# EAGLE board untitled5 (EAGLE 6.0)
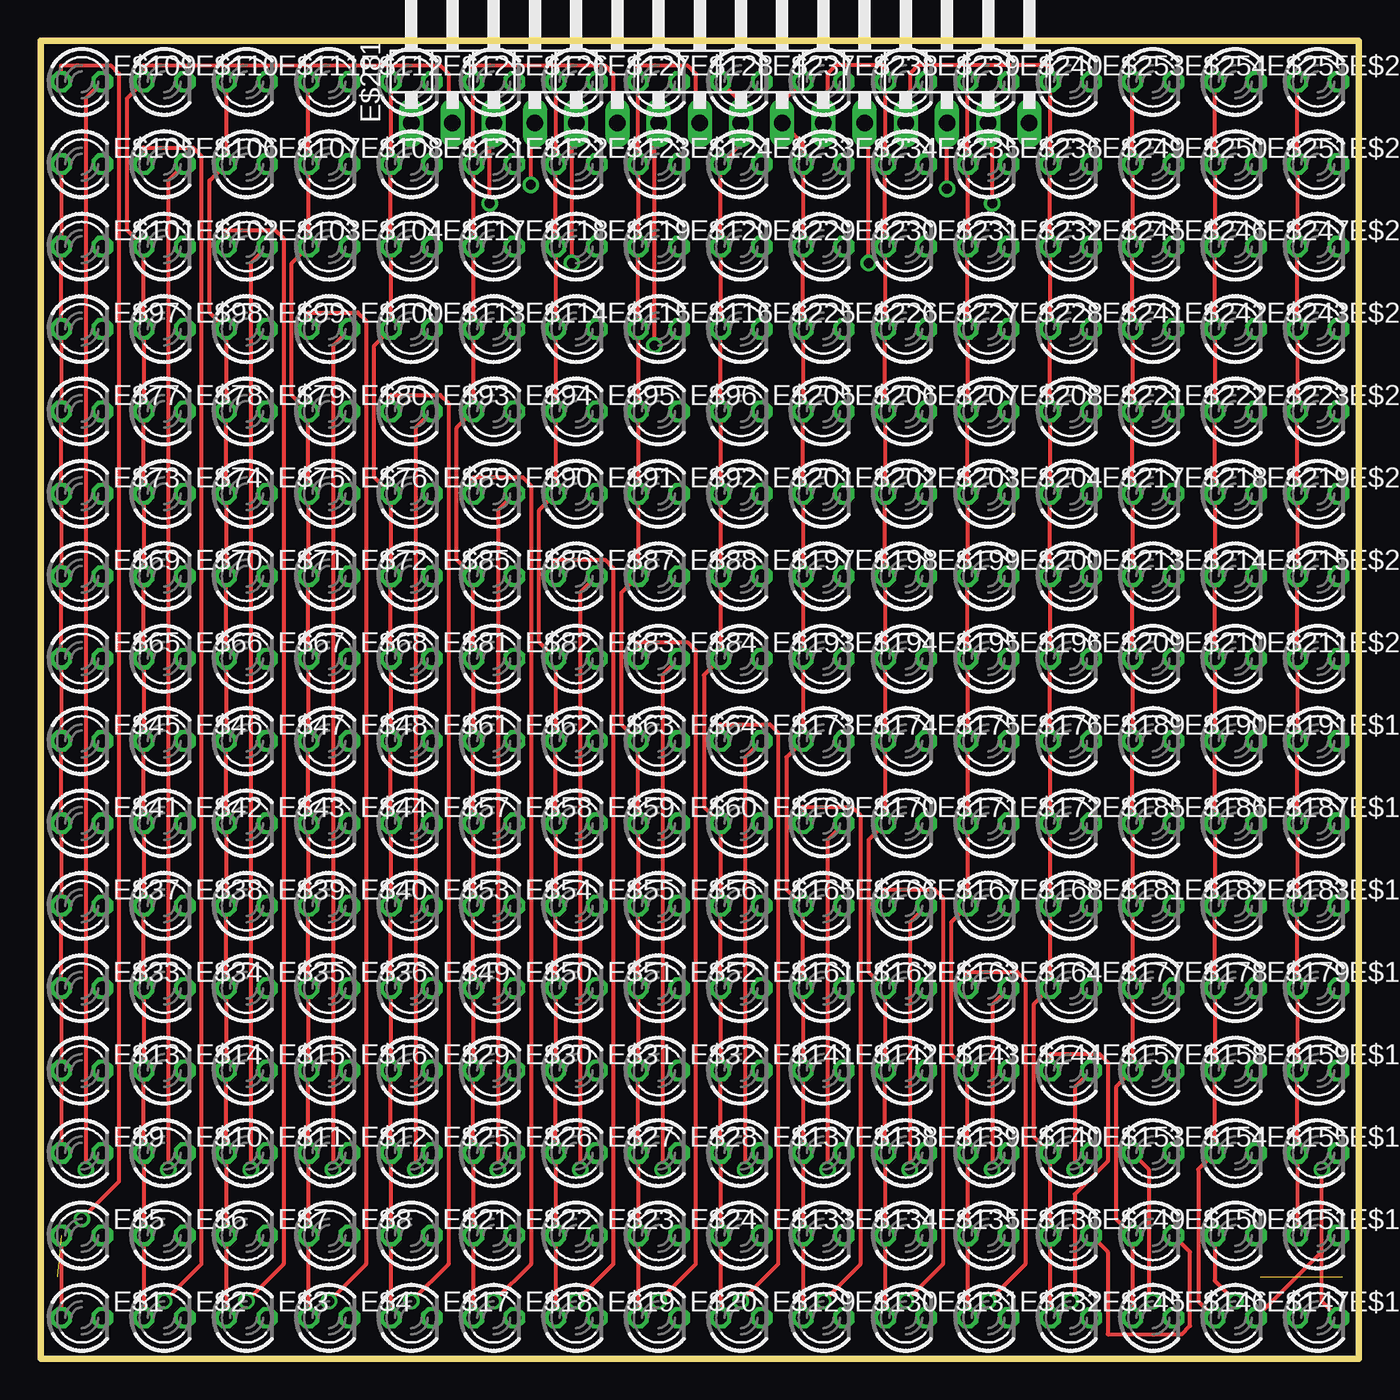
[diagram p0: board, top side]
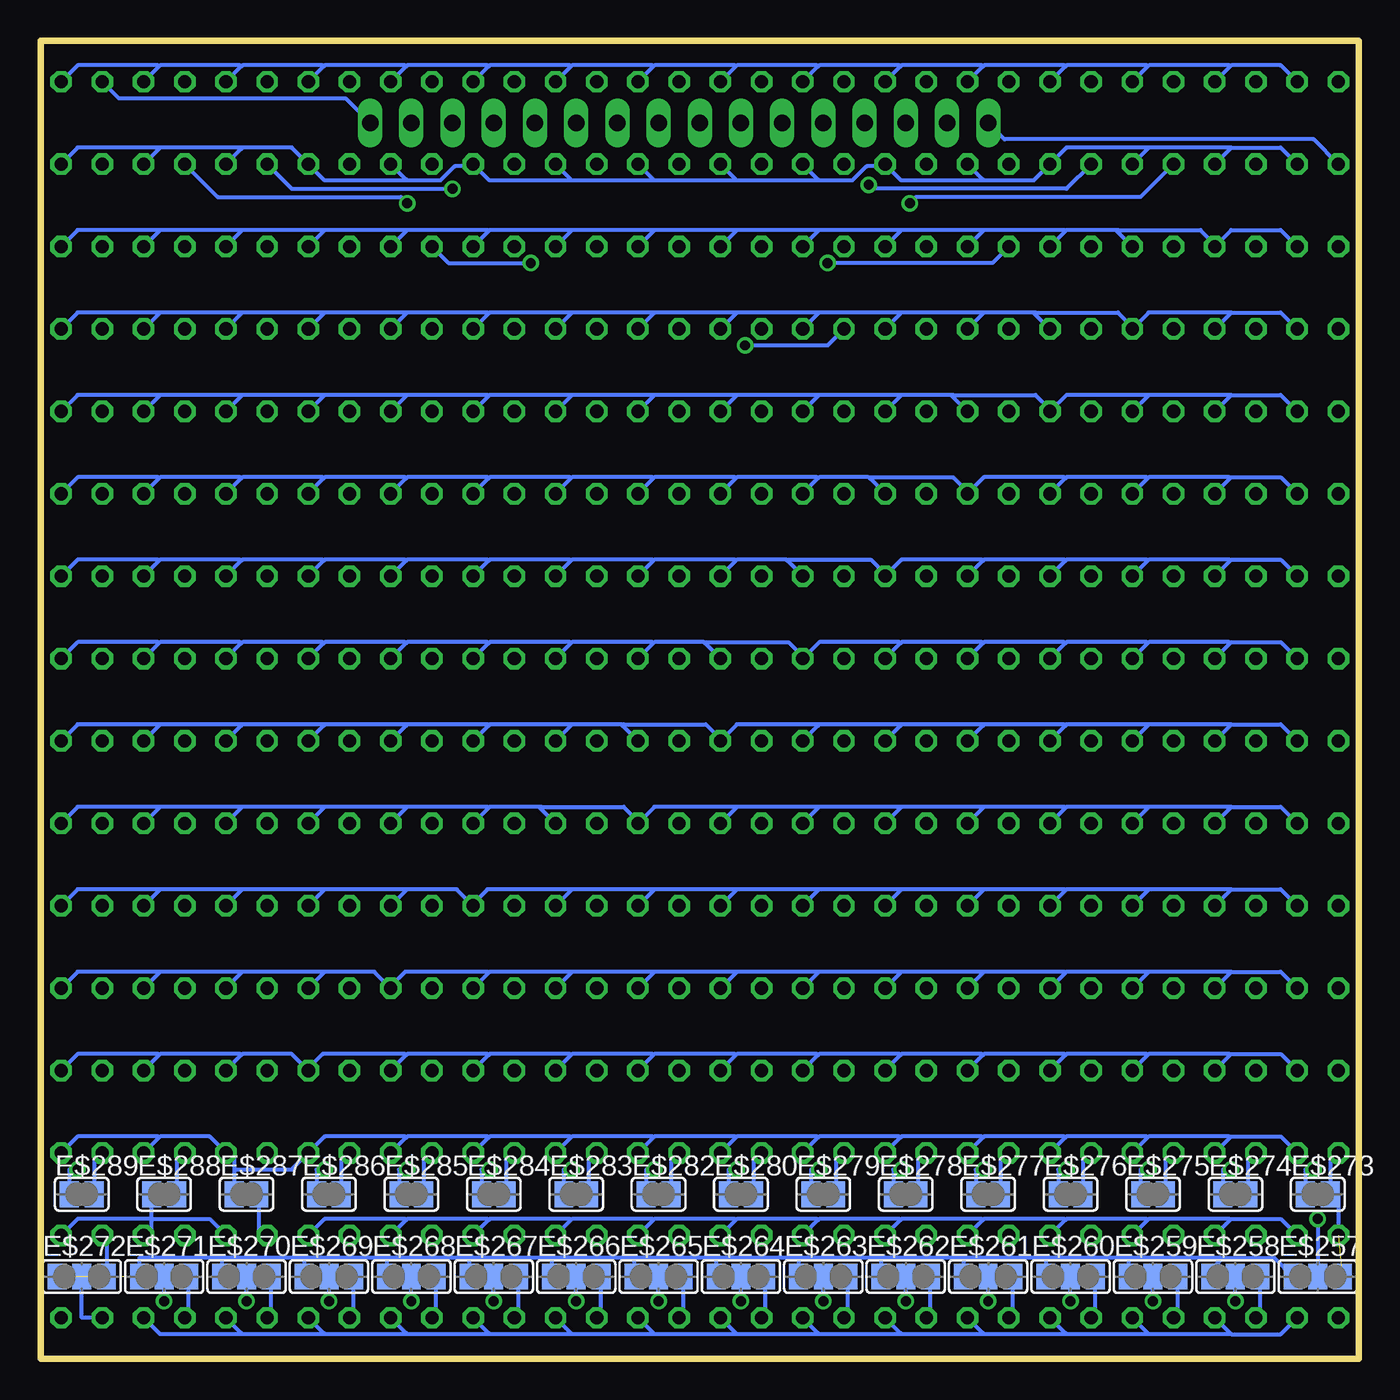
[diagram p1: board, bottom side, seen from below]

Size 81.28 x 81.28 mm. Coordinates in mm from the lower left corner, seen from the top.
Outline: 0,0 81.28,0 81.28,81.28 0,81.28 0,0
Copper layers (1*16): Top 0.035mm / dielectric 1.5mm / Bottom 0.035mm
Design rules: minimum track width 10mil, minimum drill 24mil, track to track 8mil, track to pad 8mil, pad to pad 8mil, via to via 8mil, smd to smd 8mil, copper to edge 30mil, drill to drill 8mil, minimum pad ring 10mil, minimum via ring 8mil, stop-mask expansion 4mil, vias tented up to drill 0mil, thermal gap 10mil

## Footprints (pad centres in the part's own frame; a part is rotated, then mirrored left to right if it is on the bottom)
LED3MM = drill 0.813 octagon: A -1.27,0; K 1.27,0
SJ_2 = smd 1.168 x 1.6: 1 -1.524,0; 2 0,0; 3 1.524,0
SJ = smd 1.168 x 1.6: 1 -0.762,0; 2 0.762,0
1X16/90 = drill 1.016 long: 1 -19.05,-3.81; 2 -16.51,-3.81; 3 -13.97,-3.81; 4 -11.43,-3.81; 5 -8.89,-3.81; 6 -6.35,-3.81; 7 -3.81,-3.81; 8 -1.27,-3.81; 9 1.27,-3.81; 10 3.81,-3.81; 11 6.35,-3.81; 12 8.89,-3.81; 13 11.43,-3.81; 14 13.97,-3.81; 15 16.51,-3.81; 16 19.05,-3.81

## Placement (x,y rotation side)
E$1  [LED3MM]  2.54,2.54 0 top
E$2  [LED3MM]  7.62,2.54 0 top
E$3  [LED3MM]  12.7,2.54 0 top
E$4  [LED3MM]  17.78,2.54 0 top
E$5  [LED3MM]  2.54,7.62 0 top
E$6  [LED3MM]  7.62,7.62 0 top
E$7  [LED3MM]  12.7,7.62 0 top
E$8  [LED3MM]  17.78,7.62 0 top
E$9  [LED3MM]  2.54,12.7 0 top
E$10  [LED3MM]  7.62,12.7 0 top
E$11  [LED3MM]  12.7,12.7 0 top
E$12  [LED3MM]  17.78,12.7 0 top
E$13  [LED3MM]  2.54,17.78 0 top
E$14  [LED3MM]  7.62,17.78 0 top
E$15  [LED3MM]  12.7,17.78 0 top
E$16  [LED3MM]  17.78,17.78 0 top
E$17  [LED3MM]  22.86,2.54 0 top
E$18  [LED3MM]  27.94,2.54 0 top
E$19  [LED3MM]  33.02,2.54 0 top
E$20  [LED3MM]  38.1,2.54 0 top
E$21  [LED3MM]  22.86,7.62 0 top
E$22  [LED3MM]  27.94,7.62 0 top
E$23  [LED3MM]  33.02,7.62 0 top
E$24  [LED3MM]  38.1,7.62 0 top
E$25  [LED3MM]  22.86,12.7 0 top
E$26  [LED3MM]  27.94,12.7 0 top
E$27  [LED3MM]  33.02,12.7 0 top
E$28  [LED3MM]  38.1,12.7 0 top
E$29  [LED3MM]  22.86,17.78 0 top
E$30  [LED3MM]  27.94,17.78 0 top
E$31  [LED3MM]  33.02,17.78 0 top
E$32  [LED3MM]  38.1,17.78 0 top
E$33  [LED3MM]  2.54,22.86 0 top
E$34  [LED3MM]  7.62,22.86 0 top
E$35  [LED3MM]  12.7,22.86 0 top
E$36  [LED3MM]  17.78,22.86 0 top
E$37  [LED3MM]  2.54,27.94 0 top
E$38  [LED3MM]  7.62,27.94 0 top
E$39  [LED3MM]  12.7,27.94 0 top
E$40  [LED3MM]  17.78,27.94 0 top
E$41  [LED3MM]  2.54,33.02 0 top
E$42  [LED3MM]  7.62,33.02 0 top
E$43  [LED3MM]  12.7,33.02 0 top
E$44  [LED3MM]  17.78,33.02 0 top
E$45  [LED3MM]  2.54,38.1 0 top
E$46  [LED3MM]  7.62,38.1 0 top
E$47  [LED3MM]  12.7,38.1 0 top
E$48  [LED3MM]  17.78,38.1 0 top
E$49  [LED3MM]  22.86,22.86 0 top
E$50  [LED3MM]  27.94,22.86 0 top
E$51  [LED3MM]  33.02,22.86 0 top
E$52  [LED3MM]  38.1,22.86 0 top
E$53  [LED3MM]  22.86,27.94 0 top
E$54  [LED3MM]  27.94,27.94 0 top
E$55  [LED3MM]  33.02,27.94 0 top
E$56  [LED3MM]  38.1,27.94 0 top
E$57  [LED3MM]  22.86,33.02 0 top
E$58  [LED3MM]  27.94,33.02 0 top
E$59  [LED3MM]  33.02,33.02 0 top
E$60  [LED3MM]  38.1,33.02 0 top
E$61  [LED3MM]  22.86,38.1 0 top
E$62  [LED3MM]  27.94,38.1 0 top
E$63  [LED3MM]  33.02,38.1 0 top
E$64  [LED3MM]  38.1,38.1 0 top
E$65  [LED3MM]  2.54,43.18 0 top
E$66  [LED3MM]  7.62,43.18 0 top
E$67  [LED3MM]  12.7,43.18 0 top
E$68  [LED3MM]  17.78,43.18 0 top
E$69  [LED3MM]  2.54,48.26 0 top
E$70  [LED3MM]  7.62,48.26 0 top
E$71  [LED3MM]  12.7,48.26 0 top
E$72  [LED3MM]  17.78,48.26 0 top
E$73  [LED3MM]  2.54,53.34 0 top
E$74  [LED3MM]  7.62,53.34 0 top
E$75  [LED3MM]  12.7,53.34 0 top
E$76  [LED3MM]  17.78,53.34 0 top
E$77  [LED3MM]  2.54,58.42 0 top
E$78  [LED3MM]  7.62,58.42 0 top
E$79  [LED3MM]  12.7,58.42 0 top
E$80  [LED3MM]  17.78,58.42 0 top
E$81  [LED3MM]  22.86,43.18 0 top
E$82  [LED3MM]  27.94,43.18 0 top
E$83  [LED3MM]  33.02,43.18 0 top
E$84  [LED3MM]  38.1,43.18 0 top
E$85  [LED3MM]  22.86,48.26 0 top
E$86  [LED3MM]  27.94,48.26 0 top
E$87  [LED3MM]  33.02,48.26 0 top
E$88  [LED3MM]  38.1,48.26 0 top
E$89  [LED3MM]  22.86,53.34 0 top
E$90  [LED3MM]  27.94,53.34 0 top
E$91  [LED3MM]  33.02,53.34 0 top
E$92  [LED3MM]  38.1,53.34 0 top
E$93  [LED3MM]  22.86,58.42 0 top
E$94  [LED3MM]  27.94,58.42 0 top
E$95  [LED3MM]  33.02,58.42 0 top
E$96  [LED3MM]  38.1,58.42 0 top
E$97  [LED3MM]  2.54,63.5 0 top
E$98  [LED3MM]  7.62,63.5 0 top
E$99  [LED3MM]  12.7,63.5 0 top
E$100  [LED3MM]  17.78,63.5 0 top
E$101  [LED3MM]  2.54,68.58 0 top
E$102  [LED3MM]  7.62,68.58 0 top
E$103  [LED3MM]  12.7,68.58 0 top
E$104  [LED3MM]  17.78,68.58 0 top
E$105  [LED3MM]  2.54,73.66 0 top
E$106  [LED3MM]  7.62,73.66 0 top
E$107  [LED3MM]  12.7,73.66 0 top
E$108  [LED3MM]  17.78,73.66 0 top
E$109  [LED3MM]  2.54,78.74 0 top
E$110  [LED3MM]  7.62,78.74 0 top
E$111  [LED3MM]  12.7,78.74 0 top
E$112  [LED3MM]  17.78,78.74 0 top
E$113  [LED3MM]  22.86,63.5 0 top
E$114  [LED3MM]  27.94,63.5 0 top
E$115  [LED3MM]  33.02,63.5 0 top
E$116  [LED3MM]  38.1,63.5 0 top
E$117  [LED3MM]  22.86,68.58 0 top
E$118  [LED3MM]  27.94,68.58 0 top
E$119  [LED3MM]  33.02,68.58 0 top
E$120  [LED3MM]  38.1,68.58 0 top
E$121  [LED3MM]  22.86,73.66 0 top
E$122  [LED3MM]  27.94,73.66 0 top
E$123  [LED3MM]  33.02,73.66 0 top
E$124  [LED3MM]  38.1,73.66 0 top
E$125  [LED3MM]  22.86,78.74 0 top
E$126  [LED3MM]  27.94,78.74 0 top
E$127  [LED3MM]  33.02,78.74 0 top
E$128  [LED3MM]  38.1,78.74 0 top
E$129  [LED3MM]  43.18,2.54 0 top
E$130  [LED3MM]  48.26,2.54 0 top
E$131  [LED3MM]  53.34,2.54 0 top
E$132  [LED3MM]  58.42,2.54 0 top
E$133  [LED3MM]  43.18,7.62 0 top
E$134  [LED3MM]  48.26,7.62 0 top
E$135  [LED3MM]  53.34,7.62 0 top
E$136  [LED3MM]  58.42,7.62 0 top
E$137  [LED3MM]  43.18,12.7 0 top
E$138  [LED3MM]  48.26,12.7 0 top
E$139  [LED3MM]  53.34,12.7 0 top
E$140  [LED3MM]  58.42,12.7 0 top
E$141  [LED3MM]  43.18,17.78 0 top
E$142  [LED3MM]  48.26,17.78 0 top
E$143  [LED3MM]  53.34,17.78 0 top
E$144  [LED3MM]  58.42,17.78 0 top
E$145  [LED3MM]  63.5,2.54 0 top
E$146  [LED3MM]  68.58,2.54 0 top
E$147  [LED3MM]  73.66,2.54 0 top
E$148  [LED3MM]  78.74,2.54 0 top
E$149  [LED3MM]  63.5,7.62 0 top
E$150  [LED3MM]  68.58,7.62 0 top
E$151  [LED3MM]  73.66,7.62 0 top
E$152  [LED3MM]  78.74,7.62 0 top
E$153  [LED3MM]  63.5,12.7 0 top
E$154  [LED3MM]  68.58,12.7 0 top
E$155  [LED3MM]  73.66,12.7 0 top
E$156  [LED3MM]  78.74,12.7 0 top
E$157  [LED3MM]  63.5,17.78 0 top
E$158  [LED3MM]  68.58,17.78 0 top
E$159  [LED3MM]  73.66,17.78 0 top
E$160  [LED3MM]  78.74,17.78 0 top
E$161  [LED3MM]  43.18,22.86 0 top
E$162  [LED3MM]  48.26,22.86 0 top
E$163  [LED3MM]  53.34,22.86 0 top
E$164  [LED3MM]  58.42,22.86 0 top
E$165  [LED3MM]  43.18,27.94 0 top
E$166  [LED3MM]  48.26,27.94 0 top
E$167  [LED3MM]  53.34,27.94 0 top
E$168  [LED3MM]  58.42,27.94 0 top
E$169  [LED3MM]  43.18,33.02 0 top
E$170  [LED3MM]  48.26,33.02 0 top
E$171  [LED3MM]  53.34,33.02 0 top
E$172  [LED3MM]  58.42,33.02 0 top
E$173  [LED3MM]  43.18,38.1 0 top
E$174  [LED3MM]  48.26,38.1 0 top
E$175  [LED3MM]  53.34,38.1 0 top
E$176  [LED3MM]  58.42,38.1 0 top
E$177  [LED3MM]  63.5,22.86 0 top
E$178  [LED3MM]  68.58,22.86 0 top
E$179  [LED3MM]  73.66,22.86 0 top
E$180  [LED3MM]  78.74,22.86 0 top
E$181  [LED3MM]  63.5,27.94 0 top
E$182  [LED3MM]  68.58,27.94 0 top
E$183  [LED3MM]  73.66,27.94 0 top
E$184  [LED3MM]  78.74,27.94 0 top
E$185  [LED3MM]  63.5,33.02 0 top
E$186  [LED3MM]  68.58,33.02 0 top
E$187  [LED3MM]  73.66,33.02 0 top
E$188  [LED3MM]  78.74,33.02 0 top
E$189  [LED3MM]  63.5,38.1 0 top
E$190  [LED3MM]  68.58,38.1 0 top
E$191  [LED3MM]  73.66,38.1 0 top
E$192  [LED3MM]  78.74,38.1 0 top
E$193  [LED3MM]  43.18,43.18 0 top
E$194  [LED3MM]  48.26,43.18 0 top
E$195  [LED3MM]  53.34,43.18 0 top
E$196  [LED3MM]  58.42,43.18 0 top
E$197  [LED3MM]  43.18,48.26 0 top
E$198  [LED3MM]  48.26,48.26 0 top
E$199  [LED3MM]  53.34,48.26 0 top
E$200  [LED3MM]  58.42,48.26 0 top
E$201  [LED3MM]  43.18,53.34 0 top
E$202  [LED3MM]  48.26,53.34 0 top
E$203  [LED3MM]  53.34,53.34 0 top
E$204  [LED3MM]  58.42,53.34 0 top
E$205  [LED3MM]  43.18,58.42 0 top
E$206  [LED3MM]  48.26,58.42 0 top
E$207  [LED3MM]  53.34,58.42 0 top
E$208  [LED3MM]  58.42,58.42 0 top
E$209  [LED3MM]  63.5,43.18 0 top
E$210  [LED3MM]  68.58,43.18 0 top
E$211  [LED3MM]  73.66,43.18 0 top
E$212  [LED3MM]  78.74,43.18 0 top
E$213  [LED3MM]  63.5,48.26 0 top
E$214  [LED3MM]  68.58,48.26 0 top
E$215  [LED3MM]  73.66,48.26 0 top
E$216  [LED3MM]  78.74,48.26 0 top
E$217  [LED3MM]  63.5,53.34 0 top
E$218  [LED3MM]  68.58,53.34 0 top
E$219  [LED3MM]  73.66,53.34 0 top
E$220  [LED3MM]  78.74,53.34 0 top
E$221  [LED3MM]  63.5,58.42 0 top
E$222  [LED3MM]  68.58,58.42 0 top
E$223  [LED3MM]  73.66,58.42 0 top
E$224  [LED3MM]  78.74,58.42 0 top
E$225  [LED3MM]  43.18,63.5 0 top
E$226  [LED3MM]  48.26,63.5 0 top
E$227  [LED3MM]  53.34,63.5 0 top
E$228  [LED3MM]  58.42,63.5 0 top
E$229  [LED3MM]  43.18,68.58 0 top
E$230  [LED3MM]  48.26,68.58 0 top
E$231  [LED3MM]  53.34,68.58 0 top
E$232  [LED3MM]  58.42,68.58 0 top
E$233  [LED3MM]  43.18,73.66 0 top
E$234  [LED3MM]  48.26,73.66 0 top
E$235  [LED3MM]  53.34,73.66 0 top
E$236  [LED3MM]  58.42,73.66 0 top
E$237  [LED3MM]  43.18,78.74 0 top
E$238  [LED3MM]  48.26,78.74 0 top
E$239  [LED3MM]  53.34,78.74 0 top
E$240  [LED3MM]  58.42,78.74 0 top
E$241  [LED3MM]  63.5,63.5 0 top
E$242  [LED3MM]  68.58,63.5 0 top
E$243  [LED3MM]  73.66,63.5 0 top
E$244  [LED3MM]  78.74,63.5 0 top
E$245  [LED3MM]  63.5,68.58 0 top
E$246  [LED3MM]  68.58,68.58 0 top
E$247  [LED3MM]  73.66,68.58 0 top
E$248  [LED3MM]  78.74,68.58 0 top
E$249  [LED3MM]  63.5,73.66 0 top
E$250  [LED3MM]  68.58,73.66 0 top
E$251  [LED3MM]  73.66,73.66 0 top
E$252  [LED3MM]  78.74,73.66 0 top
E$253  [LED3MM]  63.5,78.74 0 top
E$254  [LED3MM]  68.58,78.74 0 top
E$255  [LED3MM]  73.66,78.74 0 top
E$256  [LED3MM]  78.74,78.74 0 top
E$257  [SJ_2]  2.54,5.08 0 bottom
E$258  [SJ_2]  7.62,5.08 0 bottom
E$259  [SJ_2]  12.7,5.08 0 bottom
E$260  [SJ_2]  17.78,5.08 0 bottom
E$261  [SJ_2]  22.86,5.08 0 bottom
E$262  [SJ_2]  27.94,5.08 0 bottom
E$263  [SJ_2]  33.02,5.08 0 bottom
E$264  [SJ_2]  38.1,5.08 0 bottom
E$265  [SJ_2]  43.18,5.08 0 bottom
E$266  [SJ_2]  48.26,5.08 0 bottom
E$267  [SJ_2]  53.34,5.08 0 bottom
E$268  [SJ_2]  58.42,5.08 0 bottom
E$269  [SJ_2]  63.5,5.08 0 bottom
E$270  [SJ_2]  68.58,5.08 0 bottom
E$271  [SJ_2]  73.66,5.08 0 bottom
E$272  [SJ_2]  78.74,5.08 0 bottom
E$273  [SJ]  2.54,10.16 0 bottom
E$274  [SJ]  7.62,10.16 0 bottom
E$275  [SJ]  12.7,10.16 0 bottom
E$276  [SJ]  17.78,10.16 0 bottom
E$277  [SJ]  22.86,10.16 0 bottom
E$278  [SJ]  27.94,10.16 0 bottom
E$279  [SJ]  33.02,10.16 0 bottom
E$280  [SJ]  38.1,10.16 0 bottom
E$281  [1X16/90]  41.91,80.01 0 top
E$282  [SJ]  43.18,10.16 0 bottom
E$283  [SJ]  48.26,10.16 0 bottom
E$284  [SJ]  53.34,10.16 0 bottom
E$285  [SJ]  58.42,10.16 0 bottom
E$286  [SJ]  63.5,10.16 0 bottom
E$287  [SJ]  68.58,10.16 0 bottom
E$288  [SJ]  73.66,10.16 0 bottom
E$289  [SJ]  78.74,10.16 0 bottom

## Library data of the parts
E$1-E$256 = led
E$257-E$280 E$282-E$289 = jumper
E$281 = pinhead

## Nets
S$1: E$1.A E$5.A E$9.A E$13.A E$33.A E$37.A E$41.A E$45.A E$65.A E$69.A E$73.A E$77.A E$97.A E$101.A E$105.A E$257.3 E$273.2 E$281.1
S$2: E$2.A E$6.A E$10.A E$14.A E$34.A E$38.A E$42.A E$46.A E$66.A E$70.A E$74.A E$78.A E$98.A E$102.A E$110.A E$258.3 E$274.2 E$281.2
S$3: E$3.A E$7.A E$11.A E$15.A E$35.A E$39.A E$43.A E$47.A E$67.A E$71.A E$75.A E$79.A E$99.A E$107.A E$111.A E$259.3 E$275.2 E$281.3
S$4: E$4.A E$8.A E$12.A E$16.A E$36.A E$40.A E$44.A E$48.A E$68.A E$72.A E$76.A E$80.A E$104.A E$108.A E$112.A E$260.3 E$276.2 E$281.4
S$5: E$17.A E$21.A E$25.A E$29.A E$49.A E$53.A E$57.A E$61.A E$81.A E$85.A E$89.A E$113.A E$117.A E$121.A E$125.A E$261.3 E$277.2 E$281.5
S$6: E$18.A E$22.A E$26.A E$30.A E$50.A E$54.A E$58.A E$62.A E$82.A E$86.A E$94.A E$114.A E$118.A E$122.A E$126.A E$262.3 E$278.2 E$281.6
S$7: E$19.A E$23.A E$27.A E$31.A E$51.A E$55.A E$59.A E$63.A E$83.A E$91.A E$95.A E$115.A E$119.A E$123.A E$127.A E$263.3 E$279.2 E$281.7
S$8: E$109.A E$257.2
S$9: E$152.A E$156.A E$160.A E$180.A E$184.A E$188.A E$192.A E$212.A E$216.A E$220.A E$224.A E$244.A E$248.A E$252.A E$256.A E$272.3 E$281.16 E$289.2
S$10: E$147.A E$155.A E$159.A E$179.A E$183.A E$187.A E$191.A E$211.A E$215.A E$219.A E$223.A E$243.A E$247.A E$251.A E$255.A E$271.3 E$281.15 E$288.2
S$11: E$146.A E$150.A E$158.A E$178.A E$182.A E$186.A E$190.A E$210.A E$214.A E$218.A E$222.A E$242.A E$246.A E$250.A E$254.A E$270.3 E$281.14 E$287.2
S$12: E$145.A E$149.A E$153.A E$177.A E$181.A E$185.A E$189.A E$209.A E$213.A E$217.A E$221.A E$241.A E$245.A E$249.A E$253.A E$269.3 E$281.13 E$286.2
S$13: E$132.A E$136.A E$140.A E$144.A E$168.A E$172.A E$176.A E$196.A E$200.A E$204.A E$208.A E$228.A E$232.A E$236.A E$240.A E$268.3 E$281.12 E$285.2
S$14: E$131.A E$135.A E$139.A E$143.A E$163.A E$171.A E$175.A E$195.A E$199.A E$203.A E$207.A E$227.A E$231.A E$235.A E$239.A E$267.3 E$281.11 E$284.2
S$15: E$130.A E$134.A E$138.A E$142.A E$162.A E$166.A E$174.A E$194.A E$198.A E$202.A E$206.A E$226.A E$230.A E$234.A E$238.A E$266.3 E$281.10 E$283.2
S$16: E$129.A E$133.A E$137.A E$141.A E$161.A E$165.A E$169.A E$193.A E$197.A E$201.A E$205.A E$225.A E$229.A E$233.A E$237.A E$265.3 E$281.9 E$282.2
S$17: E$20.A E$24.A E$28.A E$32.A E$52.A E$56.A E$60.A E$64.A E$88.A E$92.A E$96.A E$116.A E$120.A E$124.A E$128.A E$264.3 E$280.2 E$281.8
S$18: E$1.K E$2.K E$3.K E$4.K E$17.K E$18.K E$19.K E$20.K E$129.K E$130.K E$131.K E$132.K E$145.K E$146.K E$147.K E$148.K E$289.1
S$19: E$5.K E$6.K E$7.K E$8.K E$21.K E$22.K E$23.K E$24.K E$133.K E$134.K E$135.K E$136.K E$149.K E$150.K E$151.K E$152.K E$288.1
S$20: E$9.K E$10.K E$11.K E$12.K E$25.K E$26.K E$27.K E$28.K E$137.K E$138.K E$139.K E$140.K E$153.K E$154.K E$155.K E$156.K E$287.1
S$21: E$13.K E$14.K E$15.K E$16.K E$29.K E$30.K E$31.K E$32.K E$141.K E$142.K E$143.K E$144.K E$157.K E$158.K E$159.K E$160.K E$286.1
S$22: E$33.K E$34.K E$35.K E$36.K E$49.K E$50.K E$51.K E$52.K E$161.K E$162.K E$163.K E$164.K E$177.K E$178.K E$179.K E$180.K E$285.1
S$23: E$37.K E$38.K E$39.K E$40.K E$53.K E$54.K E$55.K E$56.K E$165.K E$166.K E$167.K E$168.K E$181.K E$182.K E$183.K E$184.K E$284.1
S$24: E$41.K E$42.K E$43.K E$44.K E$57.K E$58.K E$59.K E$60.K E$169.K E$170.K E$171.K E$172.K E$185.K E$186.K E$187.K E$188.K E$283.1
S$25: E$45.K E$46.K E$47.K E$48.K E$61.K E$62.K E$63.K E$64.K E$173.K E$174.K E$175.K E$176.K E$189.K E$190.K E$191.K E$192.K E$282.1
S$26: E$65.K E$66.K E$67.K E$68.K E$81.K E$82.K E$83.K E$84.K E$193.K E$194.K E$195.K E$196.K E$209.K E$210.K E$211.K E$212.K E$280.1
S$27: E$69.K E$70.K E$71.K E$72.K E$85.K E$86.K E$87.K E$88.K E$197.K E$198.K E$199.K E$200.K E$213.K E$214.K E$215.K E$216.K E$279.1
S$28: E$73.K E$74.K E$75.K E$76.K E$89.K E$90.K E$91.K E$92.K E$201.K E$202.K E$203.K E$204.K E$217.K E$218.K E$219.K E$220.K E$278.1
S$29: E$77.K E$78.K E$79.K E$80.K E$93.K E$94.K E$95.K E$96.K E$205.K E$206.K E$207.K E$208.K E$221.K E$222.K E$223.K E$224.K E$277.1
S$30: E$97.K E$98.K E$99.K E$100.K E$113.K E$114.K E$115.K E$116.K E$225.K E$226.K E$227.K E$228.K E$241.K E$242.K E$243.K E$244.K E$276.1
S$31: E$101.K E$102.K E$103.K E$104.K E$117.K E$118.K E$119.K E$120.K E$229.K E$230.K E$231.K E$232.K E$245.K E$246.K E$247.K E$248.K E$275.1
S$32: E$105.K E$106.K E$107.K E$108.K E$121.K E$122.K E$123.K E$124.K E$233.K E$234.K E$235.K E$236.K E$249.K E$250.K E$251.K E$252.K E$274.1
S$33: E$109.K E$110.K E$111.K E$112.K E$125.K E$126.K E$127.K E$128.K E$237.K E$238.K E$239.K E$240.K E$253.K E$254.K E$255.K E$256.K E$273.1
S$34: E$106.A E$258.2
S$35: E$103.A E$259.2
S$36: E$100.A E$260.2
S$37: E$93.A E$261.2
S$38: E$90.A E$262.2
S$39: E$148.A E$272.2
S$40: E$87.A E$263.2
S$41: E$84.A E$264.2
S$42: E$173.A E$265.2
S$43: E$170.A E$266.2
S$44: E$167.A E$267.2
S$45: E$164.A E$268.2
S$46: E$157.A E$269.2
S$47: E$154.A E$270.2
S$48: E$151.A E$271.2
S$49: E$257.1 E$258.1 E$259.1 E$260.1 E$261.1 E$262.1 E$263.1 E$264.1 E$265.1 E$266.1 E$267.1 E$268.1 E$269.1 E$270.1 E$271.1 E$272.1

## Tracks (layer width: path | path; a pad name or v marks a point on that pad's centre or on a via)
S$1  (1 unrouted)
  Top 0.254: E$105.A E$101.A E$97.A E$77.A E$73.A E$69.A E$65.A E$45.A E$41.A E$37.A E$33.A E$13.A E$9.A | E$5.A E$1.A
  Bottom 0.254: E$281.1 21.84,75.18 2.79,75.18 E$105.A | E$9.A 1.78,12.7 E$273.2 1.27,10.16 E$5.A
S$2
  Top 0.254: E$281.2 25.15,76.45 25.15,79.25 24.64,79.76 6.35,79.76 E$110.A 5.33,77.72 5.33,69.6 E$102.A E$98.A E$78.A E$74.A E$70.A E$66.A E$46.A E$42.A E$38.A E$34.A E$14.A E$10.A E$6.A E$2.A
  Bottom 0.254: E$258.3 6.1,2.54 E$2.A | E$274.2 6.86,12.7 E$10.A
S$3  (via drill 0.61)
  Top 0.254: E$111.A E$107.A 10.41,72.64 10.41,64.52 E$99.A E$79.A E$75.A E$71.A E$67.A E$47.A E$43.A E$39.A E$35.A E$15.A E$11.A E$7.A E$3.A | E$281.3 27.69,75.95 v27.69,71.25
  Bottom 0.254: v27.69,71.25 27.3,71.63 13.46,71.63 E$107.A | E$259.3 11.18,2.54 E$3.A | E$275.2 11.94,12.7 E$11.A
S$4  (via drill 0.61)
  Top 0.254: E$112.A E$108.A E$104.A 15.49,67.56 15.49,59.44 E$80.A E$76.A E$72.A E$68.A E$48.A E$44.A E$40.A E$36.A E$16.A E$12.A E$8.A E$4.A | E$281.4 30.23,75.95 v30.23,72.39
  Bottom 0.254: v30.23,72.39 29.97,72.14 18.03,72.14 E$108.A | E$260.3 16.26,2.54 E$4.A | E$276.2 17.02,12.7 E$12.A
S$5  (via drill 0.61)
  Top 0.254: E$125.A E$121.A E$117.A E$113.A 20.57,62.48 20.57,54.36 E$89.A E$85.A E$81.A E$61.A E$57.A E$53.A E$49.A E$29.A E$25.A E$21.A E$17.A | E$281.5 32.77,75.95 v32.77,67.56
  Bottom 0.254: v32.77,67.56 22.61,67.56 E$117.A | E$261.3 21.34,2.54 E$17.A | E$277.2 22.1,12.7 E$25.A
S$6
  Top 0.254: E$281.6 35.31,76.45 35.31,79.25 34.8,79.76 26.67,79.76 E$126.A E$122.A E$118.A E$114.A E$94.A 25.65,57.4 25.65,49.28 E$86.A E$82.A E$62.A E$58.A E$54.A E$50.A E$30.A E$26.A E$22.A E$18.A
  Bottom 0.254: E$262.3 26.42,2.54 E$18.A | E$278.2 27.18,12.7 E$26.A
S$7  (via drill 0.61)
  Top 0.254: E$127.A E$123.A E$119.A E$115.A E$95.A E$91.A 30.73,52.32 30.73,44.2 E$83.A E$63.A E$59.A E$55.A E$51.A E$31.A E$27.A E$23.A E$19.A | E$281.7 37.85,75.95 v37.85,62.48
  Bottom 0.254: v37.85,62.48 32.77,62.48 E$115.A | E$263.3 31.5,2.54 E$19.A | E$279.2 32.26,12.7 E$27.A
S$8  (via drill 0.61)
  Top 0.254: v2.54,8.64 4.83,10.92 4.83,79.25 4.32,79.76 1.27,79.76 E$109.A
  Bottom 0.254: v2.54,8.64 E$257.2
S$9
  Top 0.254: E$256.A E$252.A E$248.A E$244.A E$224.A E$220.A E$216.A E$212.A E$192.A E$188.A E$184.A E$180.A E$160.A E$156.A E$152.A
  Bottom 0.254: E$281.16 62.48,77.72 76.45,77.72 E$256.A | E$272.3 77.22,7.62 E$152.A | E$289.2 77.98,12.7 E$156.A
S$10  (via drill 0.61)
  Top 0.254: E$255.A E$251.A E$247.A E$243.A E$223.A E$219.A E$215.A E$211.A E$191.A E$187.A E$183.A E$179.A E$159.A E$155.A 71.37,11.68 71.37,3.56 E$147.A | E$281.15 58.67,75.95 v58.67,71.25
  Bottom 0.254: v58.67,71.25 59.05,71.63 70.36,71.63 E$251.A | E$271.3 72.14,2.54 E$147.A | E$288.2 72.9,12.7 E$155.A
S$11  (via drill 0.61)
  Top 0.254: E$254.A E$250.A E$246.A E$242.A E$222.A E$218.A E$214.A E$210.A E$190.A E$186.A E$182.A E$178.A E$158.A 66.29,16.76 66.29,8.64 E$150.A E$146.A | v55.88,72.14 E$281.14
  Bottom 0.254: v55.88,72.14 65.79,72.14 E$250.A | E$270.3 67.06,2.54 E$146.A | E$287.2 67.82,7.62 E$150.A
S$12
  Top 0.254: E$281.13 53.59,76.45 53.59,79.25 54.1,79.76 62.23,79.76 E$253.A E$249.A E$245.A E$241.A E$221.A E$217.A E$213.A E$209.A E$189.A E$185.A E$181.A E$177.A 61.21,21.84 61.21,13.72 E$153.A E$149.A E$145.A
  Bottom 0.254: E$269.3 61.98,2.54 E$145.A | E$286.2 62.74,12.7 E$153.A
S$13  (via drill 0.61)
  Top 0.254: E$240.A E$236.A E$232.A E$228.A E$208.A E$204.A E$200.A E$196.A E$176.A E$172.A E$168.A 56.13,26.92 56.13,18.8 E$144.A E$140.A E$136.A E$132.A | E$281.12 51.05,75.95 v51.05,67.56
  Bottom 0.254: v51.05,67.56 56.13,67.56 E$232.A | E$268.3 56.9,2.54 E$132.A | E$285.2 57.66,12.7 E$140.A
S$14
  Top 0.254: E$131.A E$135.A E$139.A E$143.A E$163.A 51.05,23.88 51.05,32 E$171.A E$175.A E$195.A E$199.A E$203.A E$207.A E$227.A E$231.A E$235.A E$239.A 52.07,79.76 49.02,79.76 48.51,79.25 48.51,76.45 E$281.11
  Bottom 0.254: E$267.3 51.82,2.54 E$131.A | E$284.2 52.58,12.7 E$139.A
S$15
  Top 0.254: E$130.A E$134.A E$138.A E$142.A E$162.A E$166.A 45.97,28.96 45.97,37.08 E$174.A E$194.A E$198.A E$202.A E$206.A E$226.A E$230.A E$234.A 46.99,74.93 E$281.10 45.72,77.47 E$238.A
  Bottom 0.254: E$266.3 46.74,2.54 E$130.A | E$283.2 47.5,12.7 E$138.A
S$16
  Top 0.254: E$129.A E$133.A E$137.A E$141.A E$161.A E$165.A E$169.A 40.89,34.04 40.89,42.16 E$193.A E$197.A E$201.A E$205.A E$225.A E$229.A E$233.A 43.18,74.93 E$281.9 43.18,77.47 E$237.A
  Bottom 0.254: E$265.3 41.66,2.54 E$129.A | E$282.2 42.42,12.7 E$137.A
S$17
  Top 0.254: E$281.8 40.39,76.45 40.39,79.25 39.88,79.76 36.83,79.76 E$128.A E$124.A E$120.A E$116.A E$96.A E$92.A E$88.A 35.81,47.24 35.81,39.12 E$64.A E$60.A E$56.A E$52.A E$32.A E$28.A E$24.A E$20.A
  Bottom 0.254: E$264.3 36.58,2.54 E$20.A | E$280.2 37.34,12.7 E$28.A
S$18  (via drill 0.61)
  Top 0.254: 78.99,6.6 78.99,3.56 E$148.K | 78.99,6.6 v78.99,11.68 | 78.99,6.6 E$147.K
  Bottom 0.254: E$289.1 79.5,11.68 v78.99,11.68 | E$1.K 4.83,1.52 7.87,1.52 7.94,1.59 | E$2.K 7.94,1.59 | 13.02,1.59 12.95,1.52 8,1.52 7.94,1.59 | 13.02,1.59 E$3.K | 18.1,1.59 18.03,1.52 13.08,1.52 13.02,1.59 | 18.1,1.59 E$4.K | 23.18,1.59 23.11,1.52 18.16,1.52 18.1,1.59 | 23.18,1.59 E$17.K | 28.26,1.59 28.19,1.52 23.24,1.52 23.18,1.59 | 28.26,1.59 E$18.K | 33.34,1.59 33.27,1.52 28.32,1.52 28.26,1.59 | 33.34,1.59 E$19.K | 38.42,1.59 38.35,1.52 33.4,1.52 33.34,1.59 | 38.42,1.59 E$20.K | 43.5,1.59 43.43,1.52 38.48,1.52 38.42,1.59 | 43.5,1.59 E$129.K | 48.58,1.59 48.51,1.52 43.56,1.52 43.5,1.59 | 48.58,1.59 E$130.K | 53.66,1.59 53.59,1.52 48.64,1.52 48.58,1.59 | 53.66,1.59 E$131.K | 58.74,1.59 58.67,1.52 53.72,1.52 53.66,1.59 | 58.74,1.59 E$132.K | 63.82,1.59 63.75,1.52 58.8,1.52 58.74,1.59 | 63.82,1.59 E$145.K | 68.9,1.59 68.83,1.52 63.88,1.52 63.82,1.59 | 68.9,1.59 E$146.K | E$147.K 73.91,1.52 68.96,1.52 68.9,1.59
S$19
  Top 0.254: E$150.K 70.87,6.6 70.87,2.03 70.36,1.52 65.79,1.52 65.79,6.6 E$149.K
  Bottom 0.254: 74.42,8.64 74.42,7.62 E$151.K | 74.42,8.64 E$288.1 | E$150.K 70.87,8.64 74.42,8.64 | E$152.K 78.99,8.64 74.42,8.64 | E$5.K 4.83,8.64 7.87,8.64 7.94,8.57 | E$6.K 7.94,8.57 | 13.02,8.57 12.95,8.64 8,8.64 7.94,8.57 | 13.02,8.57 E$7.K | 18.1,8.57 18.03,8.64 13.08,8.64 13.02,8.57 | 18.1,8.57 E$8.K | 23.18,8.57 23.11,8.64 18.16,8.64 18.1,8.57 | 23.18,8.57 E$21.K | 28.26,8.57 28.19,8.64 23.24,8.64 23.18,8.57 | 28.26,8.57 E$22.K | 33.34,8.57 33.27,8.64 28.32,8.64 28.26,8.57 | 33.34,8.57 E$23.K | 38.42,8.57 38.35,8.64 33.4,8.64 33.34,8.57 | 38.42,8.57 E$24.K | 43.5,8.57 43.43,8.64 38.48,8.64 38.42,8.57 | 43.5,8.57 E$133.K | 48.58,8.57 48.51,8.64 43.56,8.64 43.5,8.57 | 48.58,8.57 E$134.K | 53.66,8.57 53.59,8.64 48.64,8.64 48.58,8.57 | 53.66,8.57 E$135.K | 58.74,8.57 58.67,8.64 53.72,8.64 53.66,8.57 | 58.74,8.57 E$136.K | E$149.K 63.75,8.64 58.8,8.64 58.74,8.57
S$20
  Bottom 0.254: 69.34,11.68 69.34,12.7 E$154.K 70.87,13.72 73.91,13.72 73.98,13.65 | 69.34,11.68 E$287.1 | 69.34,11.68 65.79,11.68 E$153.K 63.75,13.72 58.8,13.72 58.74,13.65 | 73.98,13.65 E$155.K | E$156.K 78.99,13.72 74.04,13.72 73.98,13.65 | E$9.K 4.83,13.72 7.87,13.72 7.94,13.65 | E$10.K 7.94,13.65 | 13.02,13.65 12.95,13.72 8,13.72 7.94,13.65 | 13.02,13.65 E$11.K | 18.1,13.65 18.03,13.72 13.08,13.72 13.02,13.65 | 18.1,13.65 E$12.K | 23.18,13.65 23.11,13.72 18.16,13.72 18.1,13.65 | 23.18,13.65 E$25.K | 28.26,13.65 28.19,13.72 23.24,13.72 23.18,13.65 | 28.26,13.65 E$26.K | 33.34,13.65 33.27,13.72 28.32,13.72 28.26,13.65 | 33.34,13.65 E$27.K | 38.42,13.65 38.35,13.72 33.4,13.72 33.34,13.65 | 38.42,13.65 E$28.K | 43.5,13.65 43.43,13.72 38.48,13.72 38.42,13.65 | 43.5,13.65 E$137.K | 48.58,13.65 48.51,13.72 43.56,13.72 43.5,13.65 | 48.58,13.65 E$138.K | 53.66,13.65 53.59,13.72 48.64,13.72 48.58,13.65 | 53.66,13.65 E$139.K | 58.74,13.65 58.67,13.72 53.72,13.72 53.66,13.65 | 58.74,13.65 E$140.K
S$21  (via drill 0.61)
  Top 0.254: v63.75,11.68 63.75,16.76 E$157.K
  Bottom 0.254: E$286.1 64.26,11.68 v63.75,11.68 | 68.9,18.73 68.83,18.8 65.79,18.8 E$157.K 64.77,17.91 63.88,18.8 58.8,18.8 58.74,18.73 | 68.9,18.73 E$158.K | 73.98,18.73 73.91,18.8 68.96,18.8 68.9,18.73 | 73.98,18.73 E$159.K | E$160.K 78.99,18.8 74.04,18.8 73.98,18.73 | E$13.K 4.83,18.8 7.87,18.8 7.94,18.73 | E$14.K 7.94,18.73 | 13.02,18.73 12.95,18.8 8,18.8 7.94,18.73 | 13.02,18.73 E$15.K | 18.1,18.73 18.03,18.8 13.08,18.8 13.02,18.73 | 18.1,18.73 E$16.K | 23.18,18.73 23.11,18.8 18.16,18.8 18.1,18.73 | 23.18,18.73 E$29.K | 28.26,18.73 28.19,18.8 23.24,18.8 23.18,18.73 | 28.26,18.73 E$30.K | 33.34,18.73 33.27,18.8 28.32,18.8 28.26,18.73 | 33.34,18.73 E$31.K | 38.42,18.73 38.35,18.8 33.4,18.8 33.34,18.73 | 38.42,18.73 E$32.K | 43.5,18.73 43.43,18.8 38.48,18.8 38.42,18.73 | 43.5,18.73 E$141.K | 48.58,18.73 48.51,18.8 43.56,18.8 43.5,18.73 | 48.58,18.73 E$142.K | 53.66,18.73 53.59,18.8 48.64,18.8 48.58,18.73 | 53.66,18.73 E$143.K | 58.74,18.73 58.67,18.8 53.72,18.8 53.66,18.73 | 58.74,18.73 E$144.K
S$22  (via drill 0.61)
  Top 0.254: v58.67,11.68 58.67,21.84 E$164.K
  Bottom 0.254: E$285.1 59.18,11.68 v58.67,11.68 | 63.82,23.81 63.75,23.88 60.71,23.88 E$164.K 59.69,22.99 58.8,23.88 53.72,23.88 53.66,23.81 | 63.82,23.81 E$177.K | 68.9,23.81 68.83,23.88 63.88,23.88 63.82,23.81 | 68.9,23.81 E$178.K | 73.98,23.81 73.91,23.88 68.96,23.88 68.9,23.81 | 73.98,23.81 E$179.K | E$180.K 78.99,23.88 74.04,23.88 73.98,23.81 | E$33.K 4.83,23.88 7.87,23.88 7.94,23.81 | E$34.K 7.94,23.81 | 13.02,23.81 12.95,23.88 8,23.88 7.94,23.81 | 13.02,23.81 E$35.K | 18.1,23.81 18.03,23.88 13.08,23.88 13.02,23.81 | 18.1,23.81 E$36.K | 23.18,23.81 23.11,23.88 18.16,23.88 18.1,23.81 | 23.18,23.81 E$49.K | 28.26,23.81 28.19,23.88 23.24,23.88 23.18,23.81 | 28.26,23.81 E$50.K | 33.34,23.81 33.27,23.88 28.32,23.88 28.26,23.81 | 33.34,23.81 E$51.K | 38.42,23.81 38.35,23.88 33.4,23.88 33.34,23.81 | 38.42,23.81 E$52.K | 43.5,23.81 43.43,23.88 38.48,23.88 38.42,23.81 | 43.5,23.81 E$161.K | 48.58,23.81 48.51,23.88 43.56,23.88 43.5,23.81 | 48.58,23.81 E$162.K | 53.66,23.81 53.59,23.88 48.64,23.88 48.58,23.81 | 53.66,23.81 E$163.K
S$23  (via drill 0.61)
  Top 0.254: v53.59,11.68 53.59,26.92 E$167.K
  Bottom 0.254: E$284.1 54.1,11.68 v53.59,11.68 | 58.74,28.89 58.67,28.96 55.63,28.96 E$167.K 54.61,28.07 53.72,28.96 48.64,28.96 48.58,28.89 | 58.74,28.89 E$168.K | 63.82,28.89 63.75,28.96 58.8,28.96 58.74,28.89 | 63.82,28.89 E$181.K | 68.9,28.89 68.83,28.96 63.88,28.96 63.82,28.89 | 68.9,28.89 E$182.K | 73.98,28.89 73.91,28.96 68.96,28.96 68.9,28.89 | 73.98,28.89 E$183.K | E$184.K 78.99,28.96 74.04,28.96 73.98,28.89 | E$37.K 4.83,28.96 7.87,28.96 7.94,28.89 | E$38.K 7.94,28.89 | 13.02,28.89 12.95,28.96 8,28.96 7.94,28.89 | 13.02,28.89 E$39.K | 18.1,28.89 18.03,28.96 13.08,28.96 13.02,28.89 | 18.1,28.89 E$40.K | 23.18,28.89 23.11,28.96 18.16,28.96 18.1,28.89 | 23.18,28.89 E$53.K | 28.26,28.89 28.19,28.96 23.24,28.96 23.18,28.89 | 28.26,28.89 E$54.K | 33.34,28.89 33.27,28.96 28.32,28.96 28.26,28.89 | 33.34,28.89 E$55.K | 38.42,28.89 38.35,28.96 33.4,28.96 33.34,28.89 | 38.42,28.89 E$56.K | 43.5,28.89 43.43,28.96 38.48,28.96 38.42,28.89 | 43.5,28.89 E$165.K | 48.58,28.89 48.51,28.96 43.56,28.96 43.5,28.89 | 48.58,28.89 E$166.K
S$24  (via drill 0.61)
  Top 0.254: v48.51,11.68 48.51,32 E$170.K
  Bottom 0.254: E$41.K 4.83,34.04 7.87,34.04 7.94,33.97 | E$42.K 7.94,33.97 | 13.02,33.97 12.95,34.04 8,34.04 7.94,33.97 | 13.02,33.97 E$43.K | 18.1,33.97 18.03,34.04 13.08,34.04 13.02,33.97 | 18.1,33.97 E$44.K | 23.18,33.97 23.11,34.04 18.16,34.04 18.1,33.97 | 23.18,33.97 E$57.K | 28.26,33.97 28.19,34.04 23.24,34.04 23.18,33.97 | 28.26,33.97 E$58.K | 33.34,33.97 33.27,34.04 28.32,34.04 28.26,33.97 | 33.34,33.97 E$59.K | 38.42,33.97 38.35,34.04 33.4,34.04 33.34,33.97 | 38.42,33.97 E$60.K | 38.42,33.97 38.48,34.04 43.43,34.04 E$169.K 44.45,33.15 45.34,34.04 50.42,34.04 50.48,33.97 | E$283.1 49.02,11.68 v48.51,11.68 | 53.66,33.97 53.59,34.04 50.55,34.04 50.48,33.97 | 53.66,33.97 E$171.K | E$170.K 50.48,33.97 | 58.74,33.97 58.67,34.04 53.72,34.04 53.66,33.97 | 58.74,33.97 E$172.K | 63.82,33.97 63.75,34.04 58.8,34.04 58.74,33.97 | 63.82,33.97 E$185.K | 68.9,33.97 68.83,34.04 63.88,34.04 63.82,33.97 | 68.9,33.97 E$186.K | 73.98,33.97 73.91,34.04 68.96,34.04 68.9,33.97 | 73.98,33.97 E$187.K | E$188.K 78.99,34.04 74.04,34.04 73.98,33.97
S$25  (via drill 0.61)
  Top 0.254: v43.43,11.68 43.43,37.08 E$173.K
  Bottom 0.254: E$45.K 4.83,39.12 7.87,39.12 7.94,39.05 | E$46.K 7.94,39.05 | 13.02,39.05 12.95,39.12 8,39.12 7.94,39.05 | 13.02,39.05 E$47.K | 18.1,39.05 18.03,39.12 13.08,39.12 13.02,39.05 | 18.1,39.05 E$48.K | 23.18,39.05 23.11,39.12 18.16,39.12 18.1,39.05 | 23.18,39.05 E$61.K | 28.26,39.05 28.19,39.12 23.24,39.12 23.18,39.05 | 28.26,39.05 E$62.K | 33.34,39.05 33.27,39.12 28.32,39.12 28.26,39.05 | 33.34,39.05 E$63.K | 33.34,39.05 33.4,39.12 38.35,39.12 E$64.K 39.37,38.23 40.26,39.12 45.34,39.12 45.4,39.05 | E$282.1 43.94,11.68 v43.43,11.68 | 48.58,39.05 48.51,39.12 45.47,39.12 45.4,39.05 | 48.58,39.05 E$174.K | E$173.K 45.4,39.05 | 53.66,39.05 53.59,39.12 48.64,39.12 48.58,39.05 | 53.66,39.05 E$175.K | 58.74,39.05 58.67,39.12 53.72,39.12 53.66,39.05 | 58.74,39.05 E$176.K | 63.82,39.05 63.75,39.12 58.8,39.12 58.74,39.05 | 63.82,39.05 E$189.K | 68.9,39.05 68.83,39.12 63.88,39.12 63.82,39.05 | 68.9,39.05 E$190.K | 73.98,39.05 73.91,39.12 68.96,39.12 68.9,39.05 | 73.98,39.05 E$191.K | E$192.K 78.99,39.12 74.04,39.12 73.98,39.05
S$26  (via drill 0.61)
  Top 0.254: v38.35,11.68 38.35,42.16 E$84.K
  Bottom 0.254: E$65.K 4.83,44.2 7.87,44.2 7.94,44.13 | E$66.K 7.94,44.13 | 13.02,44.13 12.95,44.2 8,44.2 7.94,44.13 | 13.02,44.13 E$67.K | 18.1,44.13 18.03,44.2 13.08,44.2 13.02,44.13 | 18.1,44.13 E$68.K | 23.18,44.13 23.11,44.2 18.16,44.2 18.1,44.13 | 23.18,44.13 E$81.K | 28.26,44.13 28.19,44.2 23.24,44.2 23.18,44.13 | 28.26,44.13 E$82.K | 28.26,44.13 28.32,44.2 33.27,44.2 E$83.K 34.29,43.31 35.18,44.2 40.26,44.2 40.32,44.13 | E$280.1 38.86,11.68 v38.35,11.68 | 43.5,44.13 43.43,44.2 40.39,44.2 40.32,44.13 | 43.5,44.13 E$193.K | E$84.K 40.32,44.13 | 48.58,44.13 48.51,44.2 43.56,44.2 43.5,44.13 | 48.58,44.13 E$194.K | 53.66,44.13 53.59,44.2 48.64,44.2 48.58,44.13 | 53.66,44.13 E$195.K | 58.74,44.13 58.67,44.2 53.72,44.2 53.66,44.13 | 58.74,44.13 E$196.K | 63.82,44.13 63.75,44.2 58.8,44.2 58.74,44.13 | 63.82,44.13 E$209.K | 68.9,44.13 68.83,44.2 63.88,44.2 63.82,44.13 | 68.9,44.13 E$210.K | 73.98,44.13 73.91,44.2 68.96,44.2 68.9,44.13 | 73.98,44.13 E$211.K | E$212.K 78.99,44.2 74.04,44.2 73.98,44.13
S$27  (via drill 0.61)
  Top 0.254: v33.27,11.68 33.27,47.24 E$87.K
  Bottom 0.254: E$69.K 4.83,49.28 7.87,49.28 7.94,49.21 | E$70.K 7.94,49.21 | 13.02,49.21 12.95,49.28 8,49.28 7.94,49.21 | 13.02,49.21 E$71.K | 18.1,49.21 18.03,49.28 13.08,49.28 13.02,49.21 | 18.1,49.21 E$72.K | 23.18,49.21 23.11,49.28 18.16,49.28 18.1,49.21 | 23.18,49.21 E$85.K | 23.18,49.21 23.24,49.28 28.19,49.28 E$86.K 29.21,48.39 30.1,49.28 35.18,49.28 35.24,49.21 | E$279.1 33.78,11.68 v33.27,11.68 | 38.42,49.21 38.35,49.28 35.31,49.28 35.24,49.21 | 38.42,49.21 E$88.K | E$87.K 35.24,49.21 | 43.5,49.21 43.43,49.28 38.48,49.28 38.42,49.21 | 43.5,49.21 E$197.K | 48.58,49.21 48.51,49.28 43.56,49.28 43.5,49.21 | 48.58,49.21 E$198.K | 53.66,49.21 53.59,49.28 48.64,49.28 48.58,49.21 | 53.66,49.21 E$199.K | 58.74,49.21 58.67,49.28 53.72,49.28 53.66,49.21 | 58.74,49.21 E$200.K | 63.82,49.21 63.75,49.28 58.8,49.28 58.74,49.21 | 63.82,49.21 E$213.K | 68.9,49.21 68.83,49.28 63.88,49.28 63.82,49.21 | 68.9,49.21 E$214.K | 73.98,49.21 73.91,49.28 68.96,49.28 68.9,49.21 | 73.98,49.21 E$215.K | E$216.K 78.99,49.28 74.04,49.28 73.98,49.21
S$28  (via drill 0.61)
  Top 0.254: v28.19,11.68 28.19,52.32 E$90.K
  Bottom 0.254: E$73.K 4.83,54.36 7.87,54.36 7.94,54.29 | E$74.K 7.94,54.29 | 13.02,54.29 12.95,54.36 8,54.36 7.94,54.29 | 13.02,54.29 E$75.K | 18.1,54.29 18.03,54.36 13.08,54.36 13.02,54.29 | 18.1,54.29 E$76.K | 18.1,54.29 18.16,54.36 23.11,54.36 E$89.K 24.13,53.47 25.02,54.36 30.1,54.36 30.16,54.29 | E$278.1 28.7,11.68 v28.19,11.68 | 33.34,54.29 33.27,54.36 30.23,54.36 30.16,54.29 | 33.34,54.29 E$91.K | E$90.K 30.16,54.29 | 38.42,54.29 38.35,54.36 33.4,54.36 33.34,54.29 | 38.42,54.29 E$92.K | 43.5,54.29 43.43,54.36 38.48,54.36 38.42,54.29 | 43.5,54.29 E$201.K | 48.58,54.29 48.51,54.36 43.56,54.36 43.5,54.29 | 48.58,54.29 E$202.K | 53.66,54.29 53.59,54.36 48.64,54.36 48.58,54.29 | 53.66,54.29 E$203.K | 58.74,54.29 58.67,54.36 53.72,54.36 53.66,54.29 | 58.74,54.29 E$204.K | 63.82,54.29 63.75,54.36 58.8,54.36 58.74,54.29 | 63.82,54.29 E$217.K | 68.9,54.29 68.83,54.36 63.88,54.36 63.82,54.29 | 68.9,54.29 E$218.K | 73.98,54.29 73.91,54.36 68.96,54.36 68.9,54.29 | 73.98,54.29 E$219.K | E$220.K 78.99,54.36 74.04,54.36 73.98,54.29
S$29  (via drill 0.61)
  Top 0.254: v23.11,11.68 23.11,57.4 E$93.K
  Bottom 0.254: E$77.K 4.83,59.44 7.87,59.44 7.94,59.37 | E$78.K 7.94,59.37 | 13.02,59.37 12.95,59.44 8,59.44 7.94,59.37 | 13.02,59.37 E$79.K | 13.02,59.37 13.08,59.44 18.03,59.44 E$80.K 19.05,58.55 19.94,59.44 25.02,59.44 25.08,59.37 | E$277.1 23.62,11.68 v23.11,11.68 | 28.26,59.37 28.19,59.44 25.15,59.44 25.08,59.37 | 28.26,59.37 E$94.K | E$93.K 25.08,59.37 | 33.34,59.37 33.27,59.44 28.32,59.44 28.26,59.37 | 33.34,59.37 E$95.K | 38.42,59.37 38.35,59.44 33.4,59.44 33.34,59.37 | 38.42,59.37 E$96.K | 43.5,59.37 43.43,59.44 38.48,59.44 38.42,59.37 | 43.5,59.37 E$205.K | 48.58,59.37 48.51,59.44 43.56,59.44 43.5,59.37 | 48.58,59.37 E$206.K | 53.66,59.37 53.59,59.44 48.64,59.44 48.58,59.37 | 53.66,59.37 E$207.K | 58.74,59.37 58.67,59.44 53.72,59.44 53.66,59.37 | 58.74,59.37 E$208.K | 63.82,59.37 63.75,59.44 58.8,59.44 58.74,59.37 | 63.82,59.37 E$221.K | 68.9,59.37 68.83,59.44 63.88,59.44 63.82,59.37 | 68.9,59.37 E$222.K | 73.98,59.37 73.91,59.44 68.96,59.44 68.9,59.37 | 73.98,59.37 E$223.K | E$224.K 78.99,59.44 74.04,59.44 73.98,59.37
S$30  (via drill 0.61)
  Top 0.254: v18.03,11.68 18.03,62.48 E$100.K
  Bottom 0.254: E$97.K 4.83,64.52 7.87,64.52 7.94,64.45 | E$98.K 7.94,64.45 | 7.94,64.45 8,64.52 12.95,64.52 E$99.K 13.97,63.63 14.86,64.52 19.94,64.52 20,64.45 | E$276.1 18.54,11.68 v18.03,11.68 | 23.18,64.45 23.11,64.52 20.07,64.52 20,64.45 | 23.18,64.45 E$113.K | E$100.K 20,64.45 | 28.26,64.45 28.19,64.52 23.24,64.52 23.18,64.45 | 28.26,64.45 E$114.K | 33.34,64.45 33.27,64.52 28.32,64.52 28.26,64.45 | 33.34,64.45 E$115.K | 38.42,64.45 38.35,64.52 33.4,64.52 33.34,64.45 | 38.42,64.45 E$116.K | 43.5,64.45 43.43,64.52 38.48,64.52 38.42,64.45 | 43.5,64.45 E$225.K | 48.58,64.45 48.51,64.52 43.56,64.52 43.5,64.45 | 48.58,64.45 E$226.K | 53.66,64.45 53.59,64.52 48.64,64.52 48.58,64.45 | 53.66,64.45 E$227.K | 58.74,64.45 58.67,64.52 53.72,64.52 53.66,64.45 | 58.74,64.45 E$228.K | 63.82,64.45 63.75,64.52 58.8,64.52 58.74,64.45 | 63.82,64.45 E$241.K | 68.9,64.45 68.83,64.52 63.88,64.52 63.82,64.45 | 68.9,64.45 E$242.K | 73.98,64.45 73.91,64.52 68.96,64.52 68.9,64.45 | 73.98,64.45 E$243.K | E$244.K 78.99,64.52 74.04,64.52 73.98,64.45
S$31  (via drill 0.61)
  Top 0.254: v12.95,11.68 12.95,67.56 E$103.K
  Bottom 0.254: E$101.K 4.83,69.6 7.87,69.6 E$102.K 8.89,68.71 9.78,69.6 14.86,69.6 14.92,69.53 | E$275.1 13.46,11.68 v12.95,11.68 | 18.1,69.53 18.03,69.6 14.99,69.6 14.92,69.53 | 18.1,69.53 E$104.K | E$103.K 14.92,69.53 | 23.18,69.53 23.11,69.6 18.16,69.6 18.1,69.53 | 23.18,69.53 E$117.K | 28.26,69.53 28.19,69.6 23.24,69.6 23.18,69.53 | 28.26,69.53 E$118.K | 33.34,69.53 33.27,69.6 28.32,69.6 28.26,69.53 | 33.34,69.53 E$119.K | 38.42,69.53 38.35,69.6 33.4,69.6 33.34,69.53 | 38.42,69.53 E$120.K | 43.5,69.53 43.43,69.6 38.48,69.6 38.42,69.53 | 43.5,69.53 E$229.K | 48.58,69.53 48.51,69.6 43.56,69.6 43.5,69.53 | 48.58,69.53 E$230.K | 53.66,69.53 53.59,69.6 48.64,69.6 48.58,69.53 | 53.66,69.53 E$231.K | 58.74,69.53 58.67,69.6 53.72,69.6 53.66,69.53 | 58.74,69.53 E$232.K | 63.82,69.53 63.75,69.6 58.8,69.6 58.74,69.53 | 63.82,69.53 E$245.K | 68.9,69.53 68.83,69.6 63.88,69.6 63.82,69.53 | 68.9,69.53 E$246.K | 73.98,69.53 73.91,69.6 68.96,69.6 68.9,69.53 | 73.98,69.53 E$247.K | E$248.K 78.99,69.6 74.04,69.6 73.98,69.53
S$32  (via drill 0.61)
  Top 0.254: v7.87,11.68 7.87,72.64 E$106.K
  Bottom 0.254: E$274.1 8.38,11.68 v7.87,11.68 | E$105.K 4.83,74.68 7.87,74.68 7.94,74.61 | E$106.K 7.94,74.61 | 13.02,74.61 12.95,74.68 8,74.68 7.94,74.61 | 13.02,74.61 E$107.K | 13.02,74.61 13.08,74.68 18.03,74.68 E$108.K 20.07,72.64 23.11,72.64 23.18,72.71 | 23.18,72.71 E$121.K | 23.18,72.71 23.24,72.64 28.19,72.64 E$122.K 29.21,73.53 30.35,73.53 31.24,72.64 33.27,72.64 33.34,72.71 | 33.34,72.71 E$123.K | 38.42,72.71 38.35,72.64 33.4,72.64 33.34,72.71 | 38.42,72.71 E$124.K | 43.5,72.71 43.43,72.64 38.48,72.64 38.42,72.71 | 43.5,72.71 E$233.K | 48.58,72.71 48.51,72.64 43.56,72.64 43.5,72.71 | 48.58,72.71 E$234.K | 48.58,72.71 48.64,72.64 53.59,72.64 E$235.K 54.61,73.53 55.75,73.53 56.64,72.64 58.67,72.64 58.74,72.71 | 58.74,72.71 E$236.K | 58.74,72.71 58.8,72.64 63.75,72.64 E$249.K 65.79,74.68 68.83,74.68 68.9,74.61 | 68.9,74.61 E$250.K | 73.98,74.61 73.91,74.68 68.96,74.68 68.9,74.61 | 73.98,74.61 E$251.K | E$252.K 78.99,74.68 74.04,74.68 73.98,74.61
S$33  (via drill 0.61)
  Top 0.254: v2.79,11.68 2.79,77.72 E$109.K
  Bottom 0.254: E$273.1 3.3,11.68 v2.79,11.68 | 7.94,79.69 7.87,79.76 4.83,79.76 E$109.K | 7.94,79.69 E$110.K | 13.02,79.69 12.95,79.76 8,79.76 7.94,79.69 | 13.02,79.69 E$111.K | 18.1,79.69 18.03,79.76 13.08,79.76 13.02,79.69 | 18.1,79.69 E$112.K | 23.18,79.69 23.11,79.76 18.16,79.76 18.1,79.69 | 23.18,79.69 E$125.K | 28.26,79.69 28.19,79.76 23.24,79.76 23.18,79.69 | 28.26,79.69 E$126.K | 33.34,79.69 33.27,79.76 28.32,79.76 28.26,79.69 | 33.34,79.69 E$127.K | 38.42,79.69 38.35,79.76 33.4,79.76 33.34,79.69 | 38.42,79.69 E$128.K | 43.5,79.69 43.43,79.76 38.48,79.76 38.42,79.69 | 43.5,79.69 E$237.K | 48.58,79.69 48.51,79.76 43.56,79.76 43.5,79.69 | 48.58,79.69 E$238.K | 53.66,79.69 53.59,79.76 48.64,79.76 48.58,79.69 | 53.66,79.69 E$239.K | 58.74,79.69 58.67,79.76 53.72,79.76 53.66,79.69 | 58.74,79.69 E$240.K | 63.82,79.69 63.75,79.76 58.8,79.76 58.74,79.69 | 63.82,79.69 E$253.K | 68.9,79.69 68.83,79.76 63.88,79.76 63.82,79.69 | 68.9,79.69 E$254.K | 73.98,79.69 73.91,79.76 68.96,79.76 68.9,79.69 | 73.98,79.69 E$255.K | E$256.K 78.99,79.76 74.04,79.76 73.98,79.69
S$34  (via drill 0.61)
  Top 0.254: v7.62,3.56 9.91,5.84 9.91,74.17 9.4,74.68 6.35,74.68 E$106.A
  Bottom 0.254: v7.62,3.56 E$258.2
S$35  (via drill 0.61)
  Top 0.254: v12.7,3.56 14.99,5.84 14.99,69.09 14.48,69.6 11.43,69.6 E$103.A
  Bottom 0.254: v12.7,3.56 E$259.2
S$36  (via drill 0.61)
  Top 0.254: v17.78,3.56 20.07,5.84 20.07,64.01 19.56,64.52 16.51,64.52 E$100.A
  Bottom 0.254: v17.78,3.56 E$260.2
S$37  (via drill 0.61)
  Top 0.254: v22.86,3.56 25.15,5.84 25.15,58.93 24.64,59.44 21.59,59.44 E$93.A
  Bottom 0.254: v22.86,3.56 E$261.2
S$38  (via drill 0.61)
  Top 0.254: v27.94,3.56 30.23,5.84 30.23,53.85 29.72,54.36 26.67,54.36 E$90.A
  Bottom 0.254: v27.94,3.56 E$262.2
S$39
  Bottom 0.254: E$272.2 78.74,2.54 E$148.A
S$40  (via drill 0.61)
  Top 0.254: v33.02,3.56 35.31,5.84 35.31,48.77 34.8,49.28 31.75,49.28 E$87.A
  Bottom 0.254: v33.02,3.56 E$263.2
S$41  (via drill 0.61)
  Top 0.254: v38.1,3.56 40.39,5.84 40.39,43.69 39.88,44.2 36.83,44.2 E$84.A
  Bottom 0.254: v38.1,3.56 E$264.2
S$42  (via drill 0.61)
  Top 0.254: v43.18,3.56 45.47,5.84 45.47,38.61 44.96,39.12 41.91,39.12 E$173.A
  Bottom 0.254: v43.18,3.56 E$265.2
S$43  (via drill 0.61)
  Top 0.254: v48.26,3.56 50.55,5.84 50.55,33.53 50.04,34.04 46.99,34.04 E$170.A
  Bottom 0.254: v48.26,3.56 E$266.2
S$44  (via drill 0.61)
  Top 0.254: v53.34,3.56 55.63,5.84 55.63,28.45 55.12,28.96 52.07,28.96 E$167.A
  Bottom 0.254: v53.34,3.56 E$267.2
S$45  (via drill 0.61)
  Top 0.254: v58.42,3.56 60.71,5.84 60.71,23.37 60.2,23.88 57.15,23.88 E$164.A
  Bottom 0.254: v58.42,3.56 E$268.2
S$46  (via drill 0.61)
  Top 0.254: v63.5,3.56 63.75,3.81 63.75,10.16 65.79,12.19 65.79,18.29 65.28,18.8 62.23,18.8 E$157.A
  Bottom 0.254: v63.5,3.56 E$269.2
S$47  (via drill 0.61)
  Top 0.254: v68.58,3.56 68.33,3.81 68.33,11.68 E$154.A
  Bottom 0.254: v68.58,3.56 E$270.2
S$48  (via drill 0.61)
  Top 0.254: v73.66,3.56 72.39,4.83 E$151.A
  Bottom 0.254: v73.66,3.56 E$271.2
S$49  (1 unrouted)
  Bottom 0.254: E$257.1 5.21,6.22 8.38,6.22 8.45,6.16 | 8.45,6.16 9.14,5.46 E$258.1 | 14.22,6.22 E$259.1 | 14.22,6.22 8.51,6.22 8.45,6.16 | 19.3,6.22 E$260.1 | 14.22,6.22 19.3,6.22 | 24.38,6.22 E$261.1 | 19.3,6.22 24.38,6.22 | 29.46,6.22 E$262.1 | 24.38,6.22 29.46,6.22 | 34.54,6.22 E$263.1 | 29.46,6.22 34.54,6.22 | 39.62,6.22 E$264.1 | 34.54,6.22 39.62,6.22 | 44.7,6.22 E$265.1 | 39.62,6.22 44.7,6.22 | 49.78,6.22 E$266.1 | 44.7,6.22 49.78,6.22 | 54.86,6.22 E$267.1 | 49.78,6.22 54.86,6.22 | 59.94,6.22 E$268.1 | 54.86,6.22 59.94,6.22 | 65.02,6.22 E$269.1 | 59.94,6.22 65.02,6.22 | 70.1,6.22 E$270.1 | 65.02,6.22 70.1,6.22 | E$271.1 75.18,6.22 70.1,6.22